# Altium PCB ATX.pcbdoc
Units mm, origin at the board's own origin, x right, y up, seen from the top; angles counter-clockwise.
Board outline 243.84 x 304.8 mm, 2 copper layers (Top Layer, Bottom Layer), stack 1.58 mm thick; 7 components, 0 nets, 1175 pads, 0 vias.
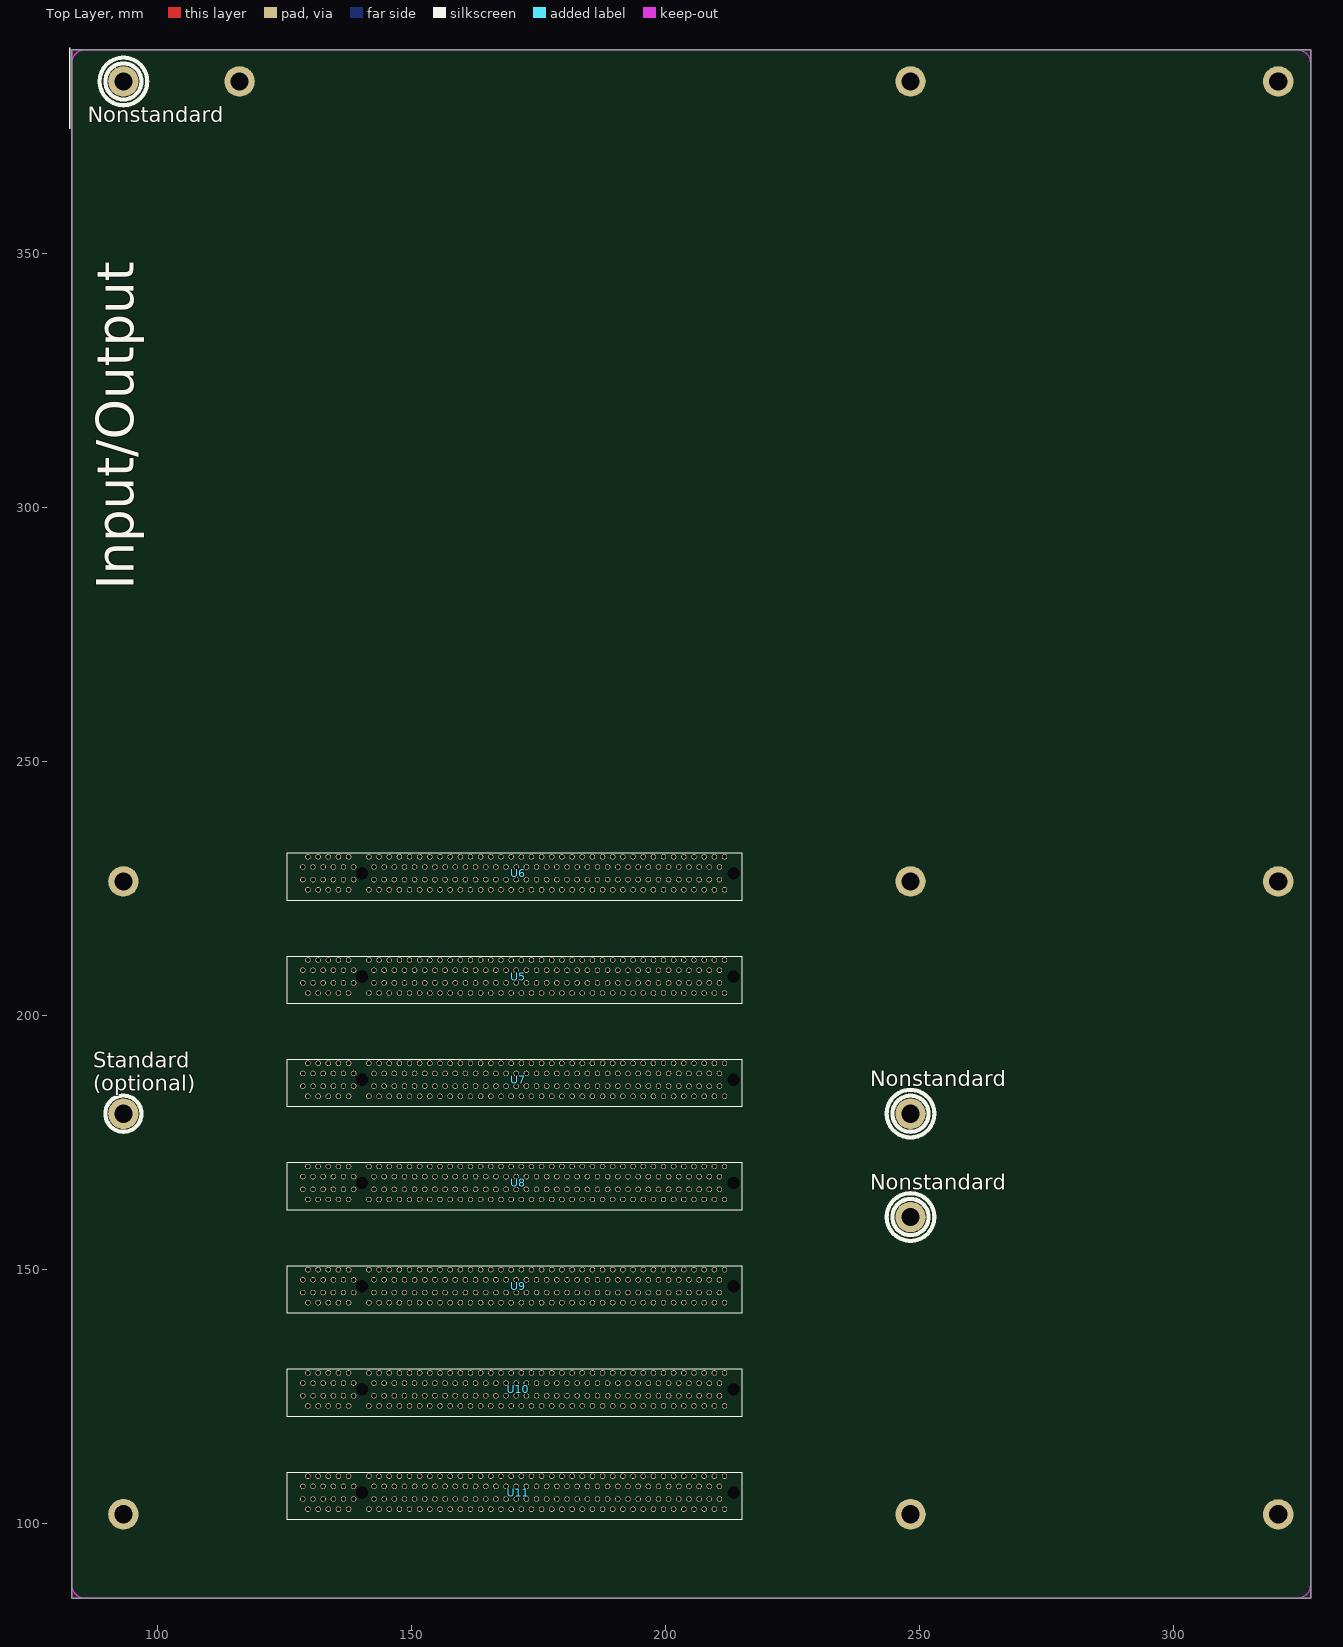
[diagram p0: Top Layer view]
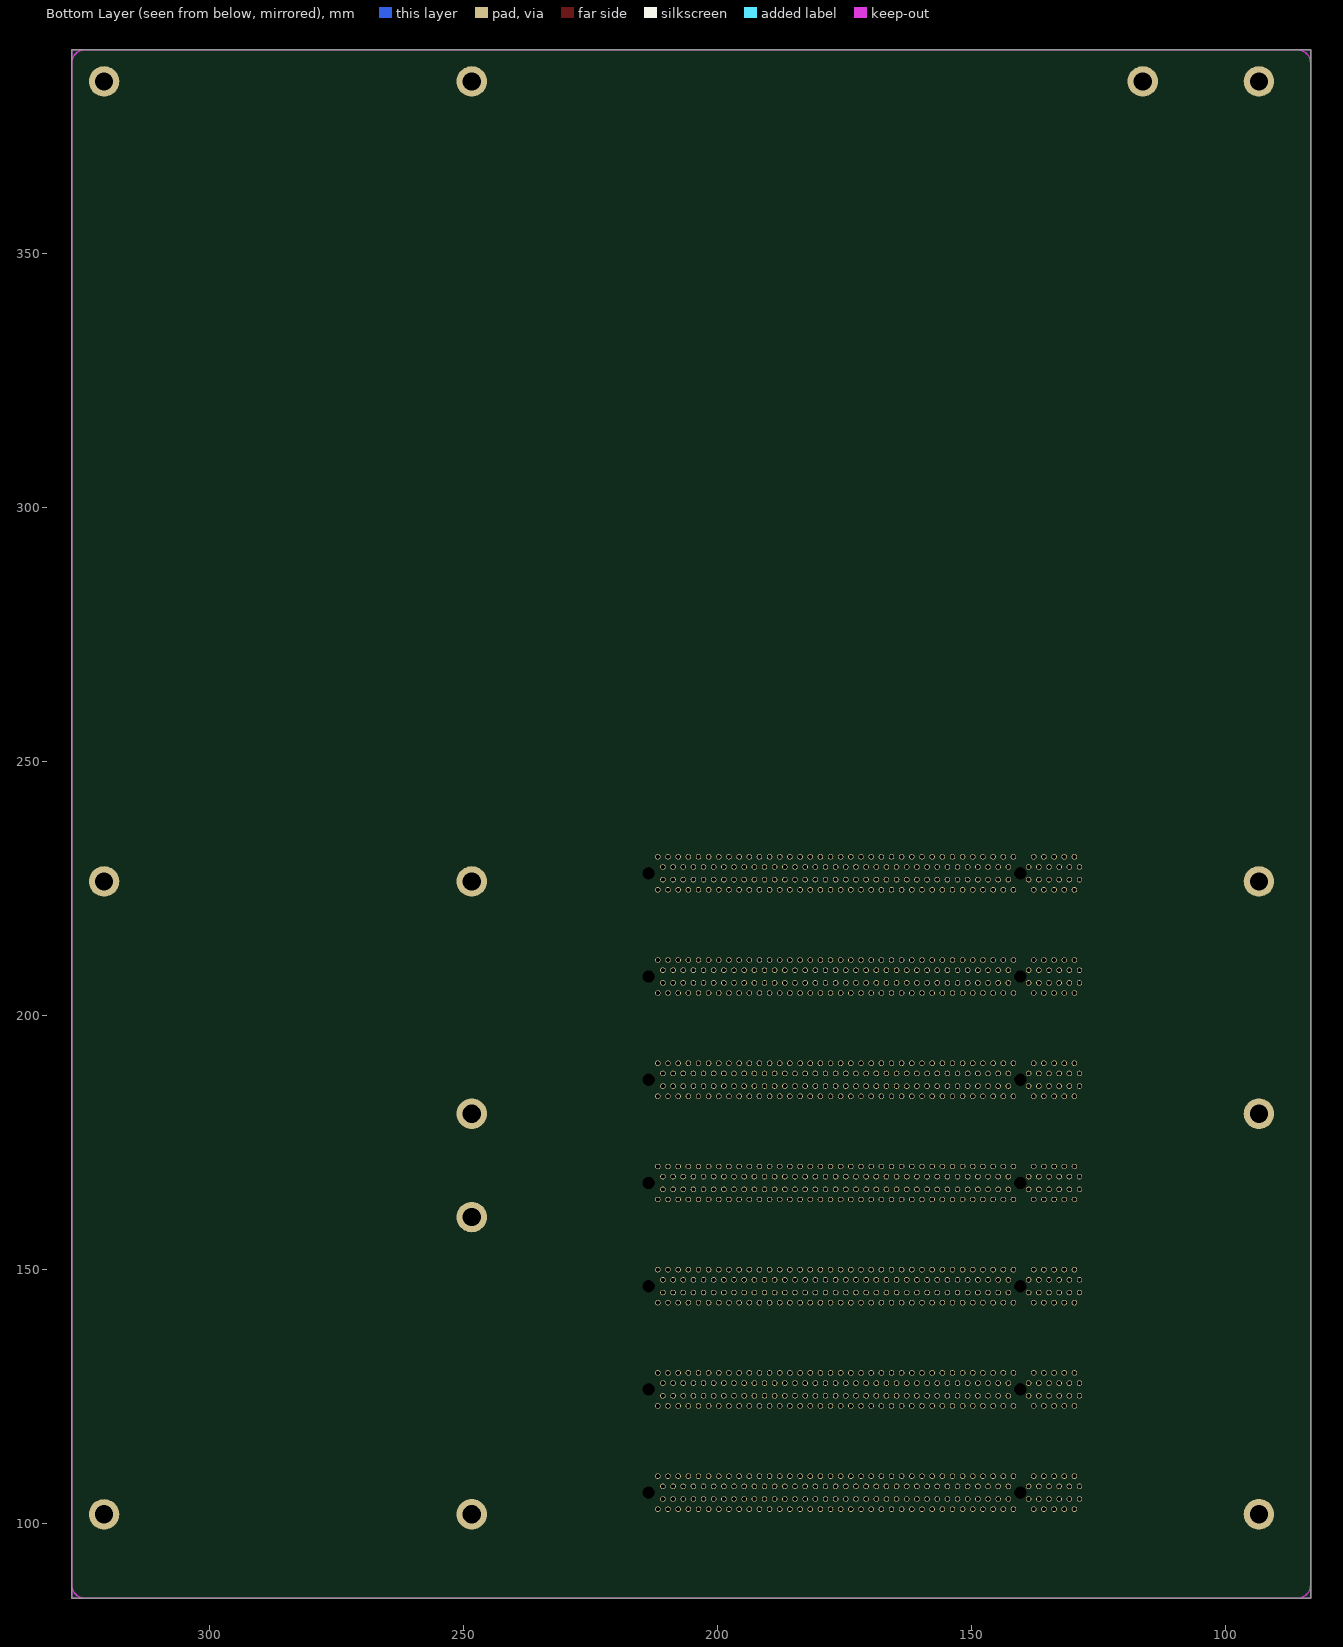
[diagram p1: Bottom Layer view, seen from below]

## Layer stack, top to bottom
Top Solder Mask Layer: solder mask 0.0102, Dk 3.3
Top Layer: signal copper 0.0356
Dielectric1: surface 1.5088, FR4, Dk 4.5
Bottom Layer: signal copper 0.0356
Bottom Solder Mask Layer: solder mask 0.0102, Dk 3.3

## Board outline
83.18,85.217 83.18,390.017 327.02,390.017 327.02,85.217

## Design rules (kind name [scope] priority, off if disabled: settings)
BoardOutlineClearance Default [All] p0: genericclearance=0.254 ignorepadtopadclearanceinfootprint=FALSE except(0: Arc-SplitContinuation Track-SplitContinuation SMDPad-SplitContinuation THPad-SplitContinuation Via-SplitContinuation Fill-SplitContinuation Poly-SplitContinuation Region-SplitContinuation Text-SplitContinuation)
BoardOutlineClearance Plane_Default [All] p0: genericclearance=0.254 ignorepadtopadclearanceinfootprint=FALSE except(0: Arc-SplitContinuation Track-SplitContinuation SMDPad-SplitContinuation THPad-SplitContinuation Via-SplitContinuation Fill-SplitContinuation Poly-SplitContinuation Region-SplitContinuation Text-SplitContinuation)
BoardOutlineClearance Copper_Default [All] p0: genericclearance=0.254 ignorepadtopadclearanceinfootprint=FALSE except(0: Arc-SplitContinuation Track-SplitContinuation SMDPad-SplitContinuation THPad-SplitContinuation Via-SplitContinuation Fill-SplitContinuation Poly-SplitContinuation Region-SplitContinuation Text-SplitContinuation)
BoardOutlineClearance otherClearance [All] p0: genericclearance=0.254 ignorepadtopadclearanceinfootprint=FALSE except(0: Arc-SplitContinuation Track-SplitContinuation SMDPad-SplitContinuation THPad-SplitContinuation Via-SplitContinuation Fill-SplitContinuation Poly-SplitContinuation Region-SplitContinuation Text-SplitContinuation)
Clearance Default [All] p1: gap=0.178 ignorepadtopadclearanceinfootprint=FALSE
Clearance Plane_Default [All] p1: gap=0.178 ignorepadtopadclearanceinfootprint=FALSE
Clearance Copper_Default [All] p1: gap=0.178 ignorepadtopadclearanceinfootprint=FALSE
Clearance otherClearance [All] p1: gap=0.178 ignorepadtopadclearanceinfootprint=FALSE
DiffPairsRouting differentialPair [All] p1: maxuncoupledlength=10 minlimit=6 maxlimit=Infinity mostfreqgap=6 toplayer_minwidth=5 toplayer_prefwidth=10 toplayer_maxwidth=100 bottomlayer_minwidth=5 bottomlayer_prefwidth=10 bottomlayer_maxwidth=100
PasteMaskExpansion Common [All] p1: expansion=0
PlaneConnect Default [All] p1: planeconnectstyle=Relief reliefexpansion=0.508 reliefentries=4 reliefconductorwidth=0 reliefairgap=0.254
PolygonConnect Default [All] p1: connectstyle=Relief reliefentries=4 reliefconductorwidth=0 polygonreliefangle="90 Angle" airgapwidth=10
RoutingVias Default [All] p1: viastyle="Through Hole" holewidth=12 minholewidth=12 maxholewidth=2362 width=12 minwidth=12 maxwidth=2362
SolderMaskExpansion Common [IsVia] p1: useseparateexpansions=TRUE expansion=-1000 expansionbottom=-1000
SolderMaskExpansion Common [All] p2: useseparateexpansions=TRUE expansion=2 expansionbottom=2
Width Default [All] p1: maxlimit=1000 minlimit=10 preferedwidth=10

## Components (designator, comment, footprint, x,y, rotation, side; value= is the part's Value field where it differs from the comment)
U5 "PCIEX16_SOLT COPY" "PCIEX16_SOLT COPY"#1 162.606,204.213 r0 top
U6 "PCIEX16_SOLT COPY" "PCIEX16_SOLT COPY"#1 162.606,224.533 r0 top
U7 "PCIEX16_SOLT COPY" "PCIEX16_SOLT COPY"#1 162.606,183.893 r0 top
U8 "PCIEX16_SOLT COPY" "PCIEX16_SOLT COPY"#2 162.606,163.571 r0 top
U9 "PCIEX16_SOLT COPY" "PCIEX16_SOLT COPY"#2 162.606,143.251 r0 top
U10 "PCIEX16_SOLT COPY" "PCIEX16_SOLT COPY"#2 162.606,122.931 r0 top
U11 "PCIEX16_SOLT COPY" "PCIEX16_SOLT COPY"#3 162.606,102.611 r0 top

## Footprints (in the part's own frame and the unit in brackets; to place one, negate y for a bottom-side part, rotate by r counter-clockwise, add the part's x,y. Pads: shape width x height; smd on the part's side, far side on the other; paste and mask are expansions set on the pad)
"PCIEX16_SOLT COPY"#1 [mil]
  round 42 hole 28 slot 28.2 at 0 deg paste+0 mask+4: A1(-1336.4,182.2) A2(-1297,261) A3(-1257.6,182.2) A4(-1218.3,261) A5(-1178.9,182.2) A6(-1139.5,261) A7(-1100.1,182.2) A8(-1060.8,261) A9(-1021.4,182.2) A10(-982,261) A11(-942.7,182.2) A12(-824.6,261) A13(-785.2,182.2) A14(-745.8,261) A15(-706.4,182.2) A16(-667.1,261) A17(-627.7,182.2) A18(-588.3,261) A19(-549,182.2) A20(-509.6,261) A21(-470.2,182.2) A22(-430.9,261) A23(-391.5,182.2) A24(-352.1,261) A25(-312.7,182.2) A26(-273.4,261) A27(-234,182.2) A28(-194.6,261) A29(-155.3,182.2) A30(-115.9,261) A31(-76.5,182.2) A32(-37.2,261) A33(2.2,182.2) A34(41.6,261) A35(81,182.2) A36(120.3,261) A37(159.7,182.2) A38(199.1,261) A39(238.4,182.2) A40(277.8,261) A41(317.2,182.2) A42(356.5,261) A43(395.9,182.2) A44(435.3,261) A45(474.7,182.2) A46(514,261) A47(553.4,182.2) A48(592.8,261) A49(632.1,182.2) A50(671.5,261) A51(710.9,182.2) A52(750.2,261) A53(789.6,182.2) A54(829,261) A55(868.4,182.2) A56(907.7,261) A57(947.1,182.2) A58(986.5,261) A59(1025.8,182.2) A60(1065.2,261) A61(1104.6,182.2) A62(1143.9,261) A63(1183.3,182.2) A64(1222.7,261) A65(1262.1,182.2) A66(1301.4,261) A67(1340.8,182.2) A68(1380.2,261) A69(1419.5,182.2) A70(1458.9,261) A71(1498.3,182.2) A72(1537.6,261) A73(1577,182.2) A74(1616.4,261) A75(1655.8,182.2) A76(1695.1,261) A77(1734.5,182.2) A78(1773.9,261) A79(1813.2,182.2) A80(1852.6,261) A81(1892,182.2) A82(1931.4,261) B1(-1336.4,83.8) B2(-1297,5.1) B3(-1257.6,83.8) B4(-1218.3,5.1) B5(-1178.9,83.8) B6(-1139.5,5.1) B7(-1100.1,83.8) B8(-1060.8,5.1) B9(-1021.4,83.8) B10(-982,5.1) B11(-942.7,83.8) B12(-824.6,5.1) B13(-785.2,83.8) B14(-745.8,5.1) B15(-706.4,83.8) B16(-667.1,5.1) B17(-627.7,83.8) B18(-588.3,5.1) B19(-549,83.8) B20(-509.6,5.1) B21(-470.2,83.8) B22(-430.9,5.1) B23(-391.5,83.8) B24(-352.1,5.1) B25(-312.7,83.8) B26(-273.4,5.1) B27(-234,83.8) B28(-194.6,5.1) B29(-155.3,83.8) B30(-115.9,5.1) B31(-76.5,83.8) B32(-37.2,5.1) B33(2.2,83.8) B34(41.6,5.1) B35(81,83.8) B36(120.3,5.1) B37(159.7,83.8) B38(199.1,5.1) B39(238.4,83.8) B40(277.8,5.1) B41(317.2,83.8) B42(356.5,5.1) B43(395.9,83.8) B44(435.3,5.1) B45(474.7,83.8) B46(514,5.1) B47(553.4,83.8) B48(592.8,5.1) B49(632.1,83.8) B50(671.5,5.1) B51(710.9,83.8) B52(750.2,5.1) B53(789.6,83.8) B54(829,5.1) B55(868.4,83.8) B56(907.7,5.1) B57(947.1,83.8) B58(986.5,5.1) B59(1025.8,83.8) B60(1065.2,5.1) B61(1104.6,83.8) B62(1143.9,5.1) B63(1183.3,83.8) B64(1222.7,5.1) B65(1262.1,83.8) B66(1301.4,5.1) B67(1340.8,83.8) B68(1380.2,5.1) B69(1419.5,83.8) B70(1458.9,5.1) B71(1498.3,83.8) B72(1537.6,5.1) B73(1577,83.8) B74(1616.4,5.1) B75(1655.8,83.8) B76(1695.1,5.1) B77(1734.5,83.8) B78(1773.9,5.1) B79(1813.2,83.8) B80(1852.6,5.1) B81(1892,83.8) B82(1931.4,5.1)
  round 10 hole 93 slot 93.2 at 0 deg unplated paste+0 mask+4: NP1(-877.7,133) NP2(2002.2,133)
  silkscreen extent -1459,-78 2065,292
"PCIEX16_SOLT COPY"#2 [mil]
  round 42 hole 28 slot 28.2 at 0 deg paste+0 mask+4: A1(-1336.4,182.3) A2(-1297,261) A3(-1257.6,182.3) A4(-1218.3,261) A5(-1178.9,182.3) A6(-1139.5,261) A7(-1100.1,182.3) A8(-1060.8,261) A9(-1021.4,182.3) A10(-982,261) A11(-942.7,182.3) A12(-824.6,261) A13(-785.2,182.3) A14(-745.8,261) A15(-706.4,182.3) A16(-667.1,261) A17(-627.7,182.3) A18(-588.3,261) A19(-549,182.3) A20(-509.6,261) A21(-470.2,182.3) A22(-430.9,261) A23(-391.5,182.3) A24(-352.1,261) A25(-312.7,182.3) A26(-273.4,261) A27(-234,182.3) A28(-194.6,261) A29(-155.3,182.3) A30(-115.9,261) A31(-76.5,182.3) A32(-37.2,261) A33(2.2,182.3) A34(41.6,261) A35(81,182.3) A36(120.3,261) A37(159.7,182.3) A38(199.1,261) A39(238.4,182.3) A40(277.8,261) A41(317.2,182.3) A42(356.5,261) A43(395.9,182.3) A44(435.3,261) A45(474.7,182.3) A46(514,261) A47(553.4,182.3) A48(592.8,261) A49(632.1,182.3) A50(671.5,261) A51(710.9,182.3) A52(750.2,261) A53(789.6,182.3) A54(829,261) A55(868.4,182.3) A56(907.7,261) A57(947.1,182.3) A58(986.5,261) A59(1025.8,182.3) A60(1065.2,261) A61(1104.6,182.3) A62(1143.9,261) A63(1183.3,182.3) A64(1222.7,261) A65(1262.1,182.3) A66(1301.4,261) A67(1340.8,182.3) A68(1380.2,261) A69(1419.5,182.3) A70(1458.9,261) A71(1498.3,182.3) A72(1537.6,261) A73(1577,182.3) A74(1616.4,261) A75(1655.8,182.3) A76(1695.1,261) A77(1734.5,182.3) A78(1773.9,261) A79(1813.2,182.3) A80(1852.6,261) A81(1892,182.3) A82(1931.4,261) B1(-1336.4,83.9) B2(-1297,5.1) B3(-1257.6,83.9) B4(-1218.3,5.1) B5(-1178.9,83.9) B6(-1139.5,5.1) B7(-1100.1,83.9) B8(-1060.8,5.1) B9(-1021.4,83.9) B10(-982,5.1) B11(-942.7,83.9) B12(-824.6,5.1) B13(-785.2,83.9) B14(-745.8,5.1) B15(-706.4,83.9) B16(-667.1,5.1) B17(-627.7,83.9) B18(-588.3,5.1) B19(-549,83.9) B20(-509.6,5.1) B21(-470.2,83.9) B22(-430.9,5.1) B23(-391.5,83.9) B24(-352.1,5.1) B25(-312.7,83.9) B26(-273.4,5.1) B27(-234,83.9) B28(-194.6,5.1) B29(-155.3,83.9) B30(-115.9,5.1) B31(-76.5,83.9) B32(-37.2,5.1) B33(2.2,83.9) B34(41.6,5.1) B35(81,83.9) B36(120.3,5.1) B37(159.7,83.9) B38(199.1,5.1) B39(238.4,83.9) B40(277.8,5.1) B41(317.2,83.9) B42(356.5,5.1) B43(395.9,83.9) B44(435.3,5.1) B45(474.7,83.9) B46(514,5.1) B47(553.4,83.9) B48(592.8,5.1) B49(632.1,83.9) B50(671.5,5.1) B51(710.9,83.9) B52(750.2,5.1) B53(789.6,83.9) B54(829,5.1) B55(868.4,83.9) B56(907.7,5.1) B57(947.1,83.9) B58(986.5,5.1) B59(1025.8,83.9) B60(1065.2,5.1) B61(1104.6,83.9) B62(1143.9,5.1) B63(1183.3,83.9) B64(1222.7,5.1) B65(1262.1,83.9) B66(1301.4,5.1) B67(1340.8,83.9) B68(1380.2,5.1) B69(1419.5,83.9) B70(1458.9,5.1) B71(1498.3,83.9) B72(1537.6,5.1) B73(1577,83.9) B74(1616.4,5.1) B75(1655.8,83.9) B76(1695.1,5.1) B77(1734.5,83.9) B78(1773.9,5.1) B79(1813.2,83.9) B80(1852.6,5.1) B81(1892,83.9) B82(1931.4,5.1)
  round 10 hole 93 slot 93.2 at 0 deg unplated paste+0 mask+4: NP1(-877.7,133.1) NP2(2002.2,133.1)
  silkscreen extent -1459,-78 2065,292
"PCIEX16_SOLT COPY"#3 [mil]
  round 42 hole 28 slot 28.2 at 0 deg paste+0 mask+4: A1(-1336.4,182.3) A2(-1297,261) A3(-1257.6,182.3) A4(-1218.3,261) A5(-1178.9,182.3) A6(-1139.5,261) A7(-1100.1,182.3) A8(-1060.8,261) A9(-1021.4,182.3) A10(-982,261) A11(-942.7,182.3) A12(-824.6,261) A13(-785.2,182.3) A14(-745.8,261) A15(-706.4,182.3) A16(-667.1,261) A17(-627.7,182.3) A18(-588.3,261) A19(-549,182.3) A20(-509.6,261) A21(-470.2,182.3) A22(-430.9,261) A23(-391.5,182.3) A24(-352.1,261) A25(-312.7,182.3) A26(-273.4,261) A27(-234,182.3) A28(-194.6,261) A29(-155.3,182.3) A30(-115.9,261) A31(-76.5,182.3) A32(-37.2,261) A33(2.2,182.3) A34(41.6,261) A35(81,182.3) A36(120.3,261) A37(159.7,182.3) A38(199.1,261) A39(238.4,182.3) A40(277.8,261) A41(317.2,182.3) A42(356.5,261) A43(395.9,182.3) A44(435.3,261) A45(474.7,182.3) A46(514,261) A47(553.4,182.3) A48(592.8,261) A49(632.1,182.3) A50(671.5,261) A51(710.9,182.3) A52(750.2,261) A53(789.6,182.3) A54(829,261) A55(868.4,182.3) A56(907.7,261) A57(947.1,182.3) A58(986.5,261) A59(1025.8,182.3) A60(1065.2,261) A61(1104.6,182.3) A62(1143.9,261) A63(1183.3,182.3) A64(1222.7,261) A65(1262.1,182.3) A66(1301.4,261) A67(1340.8,182.3) A68(1380.2,261) A69(1419.5,182.3) A70(1458.9,261) A71(1498.3,182.3) A72(1537.6,261) A73(1577,182.3) A74(1616.4,261) A75(1655.8,182.3) A76(1695.1,261) A77(1734.5,182.3) A78(1773.9,261) A79(1813.2,182.3) A80(1852.6,261) A81(1892,182.3) A82(1931.4,261) B1(-1336.4,83.8) B2(-1297,5.1) B3(-1257.6,83.8) B4(-1218.3,5.1) B5(-1178.9,83.8) B6(-1139.5,5.1) B7(-1100.1,83.8) B8(-1060.8,5.1) B9(-1021.4,83.8) B10(-982,5.1) B11(-942.7,83.8) B12(-824.6,5.1) B13(-785.2,83.8) B14(-745.8,5.1) B15(-706.4,83.8) B16(-667.1,5.1) B17(-627.7,83.8) B18(-588.3,5.1) B19(-549,83.8) B20(-509.6,5.1) B21(-470.2,83.8) B22(-430.9,5.1) B23(-391.5,83.8) B24(-352.1,5.1) B25(-312.7,83.8) B26(-273.4,5.1) B27(-234,83.8) B28(-194.6,5.1) B29(-155.3,83.8) B30(-115.9,5.1) B31(-76.5,83.8) B32(-37.2,5.1) B33(2.2,83.8) B34(41.6,5.1) B35(81,83.8) B36(120.3,5.1) B37(159.7,83.8) B38(199.1,5.1) B39(238.4,83.8) B40(277.8,5.1) B41(317.2,83.8) B42(356.5,5.1) B43(395.9,83.8) B44(435.3,5.1) B45(474.7,83.8) B46(514,5.1) B47(553.4,83.8) B48(592.8,5.1) B49(632.1,83.8) B50(671.5,5.1) B51(710.9,83.8) B52(750.2,5.1) B53(789.6,83.8) B54(829,5.1) B55(868.4,83.8) B56(907.7,5.1) B57(947.1,83.8) B58(986.5,5.1) B59(1025.8,83.8) B60(1065.2,5.1) B61(1104.6,83.8) B62(1143.9,5.1) B63(1183.3,83.8) B64(1222.7,5.1) B65(1262.1,83.8) B66(1301.4,5.1) B67(1340.8,83.8) B68(1380.2,5.1) B69(1419.5,83.8) B70(1458.9,5.1) B71(1498.3,83.8) B72(1537.6,5.1) B73(1577,83.8) B74(1616.4,5.1) B75(1655.8,83.8) B76(1695.1,5.1) B77(1734.5,83.8) B78(1773.9,5.1) B79(1813.2,83.8) B80(1852.6,5.1) B81(1892,83.8) B82(1931.4,5.1)
  round 10 hole 93 slot 93.2 at 0 deg unplated paste+0 mask+4: NP1(-877.7,133.1) NP2(2002.2,133.1)
  silkscreen extent -1459,-78 2065,292

## Free pads (board coordinates)
  round 5.999 hole 3.599 paste+0 mask+0.051: 89(93.34,101.727) 89(93.34,180.594) 89(93.34,226.314) 89(93.34,383.794) 89(116.2,383.794) 89(248.28,101.732) 89(248.28,160.246) 89(248.28,180.594) 89(248.28,226.314) 89(248.28,383.794) 89(320.67,101.714) 89(320.67,226.304) 89(320.67,383.794)

## Nets (pads, with @x,y where several pads share a name; then routed paths per layer and width w, separated by ;. In a path a pad name is that pad's centre, name@x,y a point inside that pad or via, vN(x,y) a via of type N, cw(c..) or ccw(c..) an arc to the next point about the centre after c; other vN are vias at no path point)
pads on no net: U5.A1 U5.A2 U5.A3 U5.A4 U5.A5 U5.A6 U5.A7 U5.A8 U5.A9 U5.A10 U5.A11 U5.A12 U5.A13 U5.A14 U5.A15 U5.A16 U5.A17 U5.A18 U5.A19 U5.A20 U5.A21 U5.A22 U5.A23 U5.A24 U5.A25 U5.A26 U5.A27 U5.A28 U5.A29 U5.A30 U5.A31 U5.A32 U5.A33 U5.A34 U5.A35 U5.A36 U5.A37 U5.A38 U5.A39 U5.A40 U5.A41 U5.A42 U5.A43 U5.A44 U5.A45 U5.A46 U5.A47 U5.A48 U5.A49 U5.A50 U5.A51 U5.A52 U5.A53 U5.A54 U5.A55 U5.A56 U5.A57 U5.A58 U5.A59 U5.A60 U5.A61 U5.A62 U5.A63 U5.A64 U5.A65 U5.A66 U5.A67 U5.A68 U5.A69 U5.A70 U5.A71 U5.A72 U5.A73 U5.A74 U5.A75 U5.A76 U5.A77 U5.A78 U5.A79 U5.A80 U5.A81 U5.A82 U5.B1 U5.B2 U5.B3 U5.B4 U5.B5 U5.B6 U5.B7 U5.B8 U5.B9 U5.B10 U5.B11 U5.B12 U5.B13 U5.B14 U5.B15 U5.B16 U5.B17 U5.B18 U5.B19 U5.B20 U5.B21 U5.B22 U5.B23 U5.B24 U5.B25 U5.B26 U5.B27 U5.B28 U5.B29 U5.B30 U5.B31 U5.B32 U5.B33 U5.B34 U5.B35 U5.B36 U5.B37 U5.B38 U5.B39 U5.B40 U5.B41 U5.B42 U5.B43 U5.B44 U5.B45 U5.B46 U5.B47 U5.B48 U5.B49 U5.B50 U5.B51 U5.B52 U5.B53 U5.B54 U5.B55 U5.B56 U5.B57 U5.B58 U5.B59 U5.B60 U5.B61 U5.B62 U5.B63 U5.B64 U5.B65 U5.B66 U5.B67 U5.B68 U5.B69 U5.B70 U5.B71 U5.B72 U5.B73 U5.B74 U5.B75 U5.B76 U5.B77 U5.B78 U5.B79 U5.B80 U5.B81 U5.B82 U5.NP1 U5.NP2 U6.A1 U6.A2 U6.A3 U6.A4 U6.A5 U6.A6 U6.A7 U6.A8 U6.A9 U6.A10 U6.A11 U6.A12 U6.A13 U6.A14 U6.A15 U6.A16 U6.A17 U6.A18 U6.A19 U6.A20 U6.A21 U6.A22 U6.A23 U6.A24 U6.A25 U6.A26 U6.A27 U6.A28 U6.A29 U6.A30 U6.A31 U6.A32 U6.A33 U6.A34 U6.A35 U6.A36 U6.A37 U6.A38 U6.A39 U6.A40 U6.A41 U6.A42 U6.A43 U6.A44 U6.A45 U6.A46 U6.A47 U6.A48 U6.A49 U6.A50 U6.A51 U6.A52 U6.A53 U6.A54 U6.A55 U6.A56 U6.A57 U6.A58 U6.A59 U6.A60 U6.A61 U6.A62 U6.A63 U6.A64 U6.A65 U6.A66 U6.A67 U6.A68 U6.A69 U6.A70 U6.A71 U6.A72 U6.A73 U6.A74 U6.A75 U6.A76 U6.A77 U6.A78 U6.A79 U6.A80 U6.A81 U6.A82 U6.B1 U6.B2 U6.B3 U6.B4 U6.B5 U6.B6 U6.B7 U6.B8 U6.B9 U6.B10 U6.B11 U6.B12 U6.B13 U6.B14 U6.B15 U6.B16 U6.B17 U6.B18 U6.B19 U6.B20 U6.B21 U6.B22 U6.B23 U6.B24 U6.B25 U6.B26 U6.B27 U6.B28 U6.B29 U6.B30 U6.B31 U6.B32 U6.B33 U6.B34 U6.B35 U6.B36 U6.B37 U6.B38 U6.B39 U6.B40 U6.B41 U6.B42 U6.B43 U6.B44 U6.B45 U6.B46 U6.B47 U6.B48 U6.B49 U6.B50 U6.B51 U6.B52 U6.B53 U6.B54 U6.B55 U6.B56 U6.B57 U6.B58 U6.B59 U6.B60 U6.B61 U6.B62 U6.B63 U6.B64 U6.B65 U6.B66 U6.B67 U6.B68 U6.B69 U6.B70 U6.B71 U6.B72 U6.B73 U6.B74 U6.B75 U6.B76 U6.B77 U6.B78 U6.B79 U6.B80 U6.B81 U6.B82 U6.NP1 U6.NP2 U7.A1 U7.A2 U7.A3 U7.A4 U7.A5 U7.A6 U7.A7 U7.A8 U7.A9 U7.A10 U7.A11 U7.A12 U7.A13 U7.A14 U7.A15 U7.A16 U7.A17 U7.A18 U7.A19 U7.A20 U7.A21 U7.A22 U7.A23 U7.A24 U7.A25 U7.A26 U7.A27 U7.A28 U7.A29 U7.A30 U7.A31 U7.A32 U7.A33 U7.A34 U7.A35 U7.A36 U7.A37 U7.A38 U7.A39 U7.A40 U7.A41 U7.A42 U7.A43 U7.A44 U7.A45 U7.A46 U7.A47 U7.A48 U7.A49 U7.A50 U7.A51 U7.A52 U7.A53 U7.A54 U7.A55 U7.A56 U7.A57 U7.A58 U7.A59 U7.A60 U7.A61 U7.A62 U7.A63 U7.A64 U7.A65 U7.A66 U7.A67 U7.A68 U7.A69 U7.A70 U7.A71 U7.A72 U7.A73 U7.A74 U7.A75 U7.A76 U7.A77 U7.A78 U7.A79 U7.A80 U7.A81 U7.A82 U7.B1 U7.B2 U7.B3 U7.B4 U7.B5 U7.B6 U7.B7 U7.B8 U7.B9 U7.B10 U7.B11 U7.B12 U7.B13 U7.B14 U7.B15 U7.B16 U7.B17 U7.B18 U7.B19 U7.B20 U7.B21 U7.B22 U7.B23 U7.B24 U7.B25 U7.B26 U7.B27 U7.B28 U7.B29 U7.B30 U7.B31 U7.B32 U7.B33 U7.B34 U7.B35 U7.B36 U7.B37 U7.B38 U7.B39 U7.B40 U7.B41 U7.B42 U7.B43 U7.B44 U7.B45 U7.B46 U7.B47 U7.B48 U7.B49 U7.B50 U7.B51 U7.B52 U7.B53 U7.B54 U7.B55 U7.B56 U7.B57 U7.B58 U7.B59 U7.B60 U7.B61 U7.B62 U7.B63 U7.B64 U7.B65 U7.B66 U7.B67 U7.B68 U7.B69 U7.B70 U7.B71 U7.B72 U7.B73 U7.B74 U7.B75 U7.B76 U7.B77 U7.B78 U7.B79 U7.B80 U7.B81 U7.B82 U7.NP1 U7.NP2 U8.A1 U8.A2 U8.A3 U8.A4 U8.A5 U8.A6 U8.A7 U8.A8 U8.A9 U8.A10 U8.A11 U8.A12 U8.A13 U8.A14 U8.A15 U8.A16 U8.A17 U8.A18 U8.A19 U8.A20 U8.A21 U8.A22 U8.A23 U8.A24 U8.A25 U8.A26 U8.A27 U8.A28 U8.A29 U8.A30 U8.A31 U8.A32 U8.A33 U8.A34 U8.A35 U8.A36 U8.A37 U8.A38 U8.A39 U8.A40 U8.A41 U8.A42 U8.A43 U8.A44 U8.A45 U8.A46 U8.A47 U8.A48 U8.A49 U8.A50 U8.A51 U8.A52 U8.A53 U8.A54 U8.A55 U8.A56 U8.A57 U8.A58 U8.A59 U8.A60 U8.A61 U8.A62 U8.A63 U8.A64 U8.A65 U8.A66 U8.A67 U8.A68 U8.A69 U8.A70 U8.A71 U8.A72 U8.A73 U8.A74 U8.A75 U8.A76 U8.A77 U8.A78 U8.A79 U8.A80 U8.A81 U8.A82 U8.B1 U8.B2 U8.B3 U8.B4 U8.B5 U8.B6 U8.B7 U8.B8 U8.B9 U8.B10 U8.B11 U8.B12 U8.B13 U8.B14 U8.B15 U8.B16 U8.B17 U8.B18 U8.B19 U8.B20 U8.B21 U8.B22 U8.B23 U8.B24 U8.B25 U8.B26 U8.B27 U8.B28 U8.B29 U8.B30 U8.B31 U8.B32 U8.B33 U8.B34 U8.B35 U8.B36 U8.B37 U8.B38 U8.B39 U8.B40 U8.B41 U8.B42 U8.B43 U8.B44 U8.B45 U8.B46 U8.B47 U8.B48 U8.B49 U8.B50 U8.B51 U8.B52 U8.B53 U8.B54 U8.B55 U8.B56 U8.B57 U8.B58 U8.B59 U8.B60 U8.B61 U8.B62 U8.B63 U8.B64 U8.B65 U8.B66 U8.B67 U8.B68 U8.B69 U8.B70 U8.B71 U8.B72 U8.B73 U8.B74 U8.B75 U8.B76 U8.B77 U8.B78 U8.B79 U8.B80 U8.B81 U8.B82 U8.NP1 U8.NP2 U9.A1 U9.A2 U9.A3 U9.A4 U9.A5 U9.A6 U9.A7 U9.A8 U9.A9 U9.A10 U9.A11 U9.A12 U9.A13 U9.A14 U9.A15 U9.A16 U9.A17 U9.A18 U9.A19 U9.A20 U9.A21 U9.A22 U9.A23 U9.A24 U9.A25 U9.A26 U9.A27 U9.A28 U9.A29 U9.A30 U9.A31 U9.A32 U9.A33 U9.A34 U9.A35 U9.A36 U9.A37 U9.A38 U9.A39 U9.A40 U9.A41 U9.A42 U9.A43 U9.A44 U9.A45 U9.A46 U9.A47 U9.A48 U9.A49 U9.A50 U9.A51 U9.A52 U9.A53 U9.A54 U9.A55 U9.A56 U9.A57 U9.A58 U9.A59 U9.A60 U9.A61 U9.A62 U9.A63 U9.A64 U9.A65 U9.A66 U9.A67 U9.A68 U9.A69 U9.A70 U9.A71 U9.A72 U9.A73 U9.A74 U9.A75 U9.A76 U9.A77 U9.A78 U9.A79 U9.A80 U9.A81 U9.A82 U9.B1 U9.B2 U9.B3 U9.B4 U9.B5 U9.B6 U9.B7 U9.B8 U9.B9 U9.B10 U9.B11 U9.B12 U9.B13 U9.B14 U9.B15 U9.B16 U9.B17 U9.B18 U9.B19 U9.B20 U9.B21 U9.B22 U9.B23 U9.B24 U9.B25 U9.B26 U9.B27 U9.B28 U9.B29 U9.B30 U9.B31 U9.B32 U9.B33 U9.B34 U9.B35 U9.B36 U9.B37 U9.B38 U9.B39 U9.B40 U9.B41 U9.B42 U9.B43 U9.B44 U9.B45 U9.B46 U9.B47 U9.B48 U9.B49 U9.B50 U9.B51 U9.B52 U9.B53 U9.B54 U9.B55 U9.B56 U9.B57 U9.B58 U9.B59 U9.B60 U9.B61 U9.B62 U9.B63 U9.B64 U9.B65 U9.B66 U9.B67 U9.B68 U9.B69 U9.B70 U9.B71 U9.B72 U9.B73 U9.B74 U9.B75 U9.B76 U9.B77 U9.B78 U9.B79 U9.B80 U9.B81 U9.B82 U9.NP1 U9.NP2 U10.A1 U10.A2 U10.A3 U10.A4 U10.A5 U10.A6 U10.A7 U10.A8 U10.A9 U10.A10 U10.A11 U10.A12 U10.A13 U10.A14 U10.A15 U10.A16 U10.A17 U10.A18 U10.A19 U10.A20 U10.A21 U10.A22 U10.A23 U10.A24 U10.A25 U10.A26 U10.A27 U10.A28 U10.A29 U10.A30 U10.A31 U10.A32 U10.A33 U10.A34 U10.A35 U10.A36 U10.A37 U10.A38 U10.A39 U10.A40 U10.A41 U10.A42 U10.A43 U10.A44 U10.A45 U10.A46 U10.A47 U10.A48 U10.A49 U10.A50 U10.A51 U10.A52 U10.A53 U10.A54 U10.A55 U10.A56 U10.A57 U10.A58 U10.A59 U10.A60 U10.A61 U10.A62 U10.A63 U10.A64 U10.A65 U10.A66 U10.A67 U10.A68 U10.A69 U10.A70 U10.A71 U10.A72 U10.A73 U10.A74 U10.A75 U10.A76 U10.A77 U10.A78 U10.A79 U10.A80 U10.A81 U10.A82 U10.B1 U10.B2 U10.B3 U10.B4 U10.B5 U10.B6 U10.B7 U10.B8 U10.B9 U10.B10 U10.B11 U10.B12 U10.B13 U10.B14 U10.B15 U10.B16 U10.B17 U10.B18 U10.B19 U10.B20 U10.B21 U10.B22 U10.B23 U10.B24 U10.B25 U10.B26 U10.B27 U10.B28 U10.B29 U10.B30 U10.B31 U10.B32 U10.B33 U10.B34 U10.B35 U10.B36 U10.B37 U10.B38 U10.B39 U10.B40 U10.B41 U10.B42 U10.B43 U10.B44 U10.B45 U10.B46 U10.B47 U10.B48 U10.B49 U10.B50 U10.B51 U10.B52 U10.B53 U10.B54 U10.B55 U10.B56 U10.B57 U10.B58 U10.B59 U10.B60 U10.B61 U10.B62 U10.B63 U10.B64 U10.B65 U10.B66 U10.B67 U10.B68 U10.B69 U10.B70 U10.B71 U10.B72 U10.B73 U10.B74 U10.B75 U10.B76 U10.B77 U10.B78 U10.B79 U10.B80 U10.B81 U10.B82 U10.NP1 U10.NP2 U11.A1 U11.A2 U11.A3 U11.A4 U11.A5 U11.A6 U11.A7 U11.A8 U11.A9 U11.A10 U11.A11 U11.A12 U11.A13 U11.A14 U11.A15 U11.A16 U11.A17 U11.A18 U11.A19 U11.A20 U11.A21 U11.A22 U11.A23 U11.A24 U11.A25 U11.A26 U11.A27 U11.A28 U11.A29 U11.A30 U11.A31 U11.A32 U11.A33 U11.A34 U11.A35 U11.A36 U11.A37 U11.A38 U11.A39 U11.A40 U11.A41 U11.A42 U11.A43 U11.A44 U11.A45 U11.A46 U11.A47 U11.A48 U11.A49 U11.A50 U11.A51 U11.A52 U11.A53 U11.A54 U11.A55 U11.A56 U11.A57 U11.A58 U11.A59 U11.A60 U11.A61 U11.A62 U11.A63 U11.A64 U11.A65 U11.A66 U11.A67 U11.A68 U11.A69 U11.A70 U11.A71 U11.A72 U11.A73 U11.A74 U11.A75 U11.A76 U11.A77 U11.A78 U11.A79 U11.A80 U11.A81 U11.A82 U11.B1 U11.B2 U11.B3 U11.B4 U11.B5 U11.B6 U11.B7 U11.B8 U11.B9 U11.B10 U11.B11 U11.B12 U11.B13 U11.B14 U11.B15 U11.B16 U11.B17 U11.B18 U11.B19 U11.B20 U11.B21 U11.B22 U11.B23 U11.B24 U11.B25 U11.B26 U11.B27 U11.B28 U11.B29 U11.B30 U11.B31 U11.B32 U11.B33 U11.B34 U11.B35 U11.B36 U11.B37 U11.B38 U11.B39 U11.B40 U11.B41 U11.B42 U11.B43 U11.B44 U11.B45 U11.B46 U11.B47 U11.B48 U11.B49 U11.B50 U11.B51 U11.B52 U11.B53 U11.B54 U11.B55 U11.B56 U11.B57 U11.B58 U11.B59 U11.B60 U11.B61 U11.B62 U11.B63 U11.B64 U11.B65 U11.B66 U11.B67 U11.B68 U11.B69 U11.B70 U11.B71 U11.B72 U11.B73 U11.B74 U11.B75 U11.B76 U11.B77 U11.B78 U11.B79 U11.B80 U11.B81 U11.B82 U11.NP1 U11.NP2

## Keep-outs
Board Outline Layer:
  lines w0.254: 83.18,87.81 83.19,87.584 83.221,87.361 83.269,87.14 83.337,86.924 83.424,86.716 83.528,86.515 83.65,86.322 83.787,86.144 83.939,85.976 84.107,85.824 84.285,85.687 84.478,85.565 84.679,85.461 84.887,85.374 85.103,85.306 85.324,85.255 85.547,85.227 85.773,85.217 ; 83.18,387.424 83.19,387.65 83.221,387.873 83.269,388.094 83.337,388.31 83.424,388.518 83.528,388.719 83.65,388.91 83.787,389.09 83.939,389.258 84.107,389.41 84.285,389.547 84.478,389.669 84.679,389.773 84.887,389.86 85.103,389.928 85.324,389.976 85.547,390.007 85.773,390.017 ; 324.427,85.217 324.653,85.227 324.876,85.258 325.097,85.306 325.313,85.374 325.521,85.461 325.722,85.565 325.912,85.687 326.093,85.824 326.26,85.976 326.413,86.144 326.55,86.322 326.672,86.515 326.776,86.716 326.862,86.924 326.931,87.14 326.979,87.361 327.01,87.584 327.02,87.81 ; 324.427,390.017 324.653,390.007 324.876,389.976 325.097,389.928 325.313,389.86 325.521,389.773 325.722,389.669 325.912,389.547 326.093,389.41 326.26,389.258 326.413,389.09 326.55,388.91 326.672,388.719 326.776,388.518 326.862,388.31 326.931,388.094 326.979,387.873 327.01,387.65 327.02,387.424 ; 83.18,85.217 83.18,390.017 327.02,390.017 327.02,85.217 83.18,85.217

## Silkscreen, mask and mechanical layers (free items; w line width, h text height)
Top Silkscreen Layer:
  drawing of 625 lines, arcs and shapes, not listed
  text "Nonstandard" at 86.33,375.745 h3
  text "Input/Output" at 95.344,283.721 h7.37 r90
  text "Nonstandard" at 240.381,186.007 h3
  text "Standard / (optional)" at 87.414,185.133 h2.99
  text "Nonstandard" at 240.381,165.659 h3
Document Layer:
  drawing of 633 lines, arcs and shapes, not listed
  text "Nonstandard" at 86.33,375.745 h3
  text "Nonstandard" at 240.381,186.007 h3
  text "Standard / (optional)" at 87.414,185.133 h2.99
  text "Nonstandard" at 240.381,165.659 h3

## Dimensions
77.899,85.217 to 77.899,390.017 on Document Layer
83.18,78.524 to 327.02,78.524 on Document Layer
76.2,219.964 to 76.2,389.964 on Document Layer
81.74,390.03 to 81.597,231.28 on Document Layer
259.169,219.964 to 259.169,226.314 on Document Layer
93.34,393.913 to 116.2,393.913 on Document Layer
259.159,226.314 to 259.159,383.794 on Document Layer
93.34,392.557 to 248.28,392.557 on Document Layer
93.34,214.546 to 140.279,214.546 on Document Layer
102.697,226.314 to 102.697,227.884 on Document Layer
202.065,85.217 to 202.065,101.727 on Document Layer
195.923,85.217 to 195.923,101.727 on Document Layer
83.18,209.309 to 93.34,209.309 on Document Layer
93.34,391.305 to 320.67,391.305 on Document Layer
99.2,226.314 to 99.2,180.594 on Document Layer
221.16,224.663 to 221.16,204.343 on Document Layer
239.771,180.558 to 239.771,160.238 on Document Layer